# Altium PCB GPIOmodule.PcbDoc
Units mm, origin at the board's own origin, x right, y up, seen from the top; angles counter-clockwise.
Board outline 73.2 x 49.2 mm, 2 copper layers (Top Layer, Bottom Layer), stack 1.58 mm thick; 41 components, 27 nets, 131 pads, 14 vias.
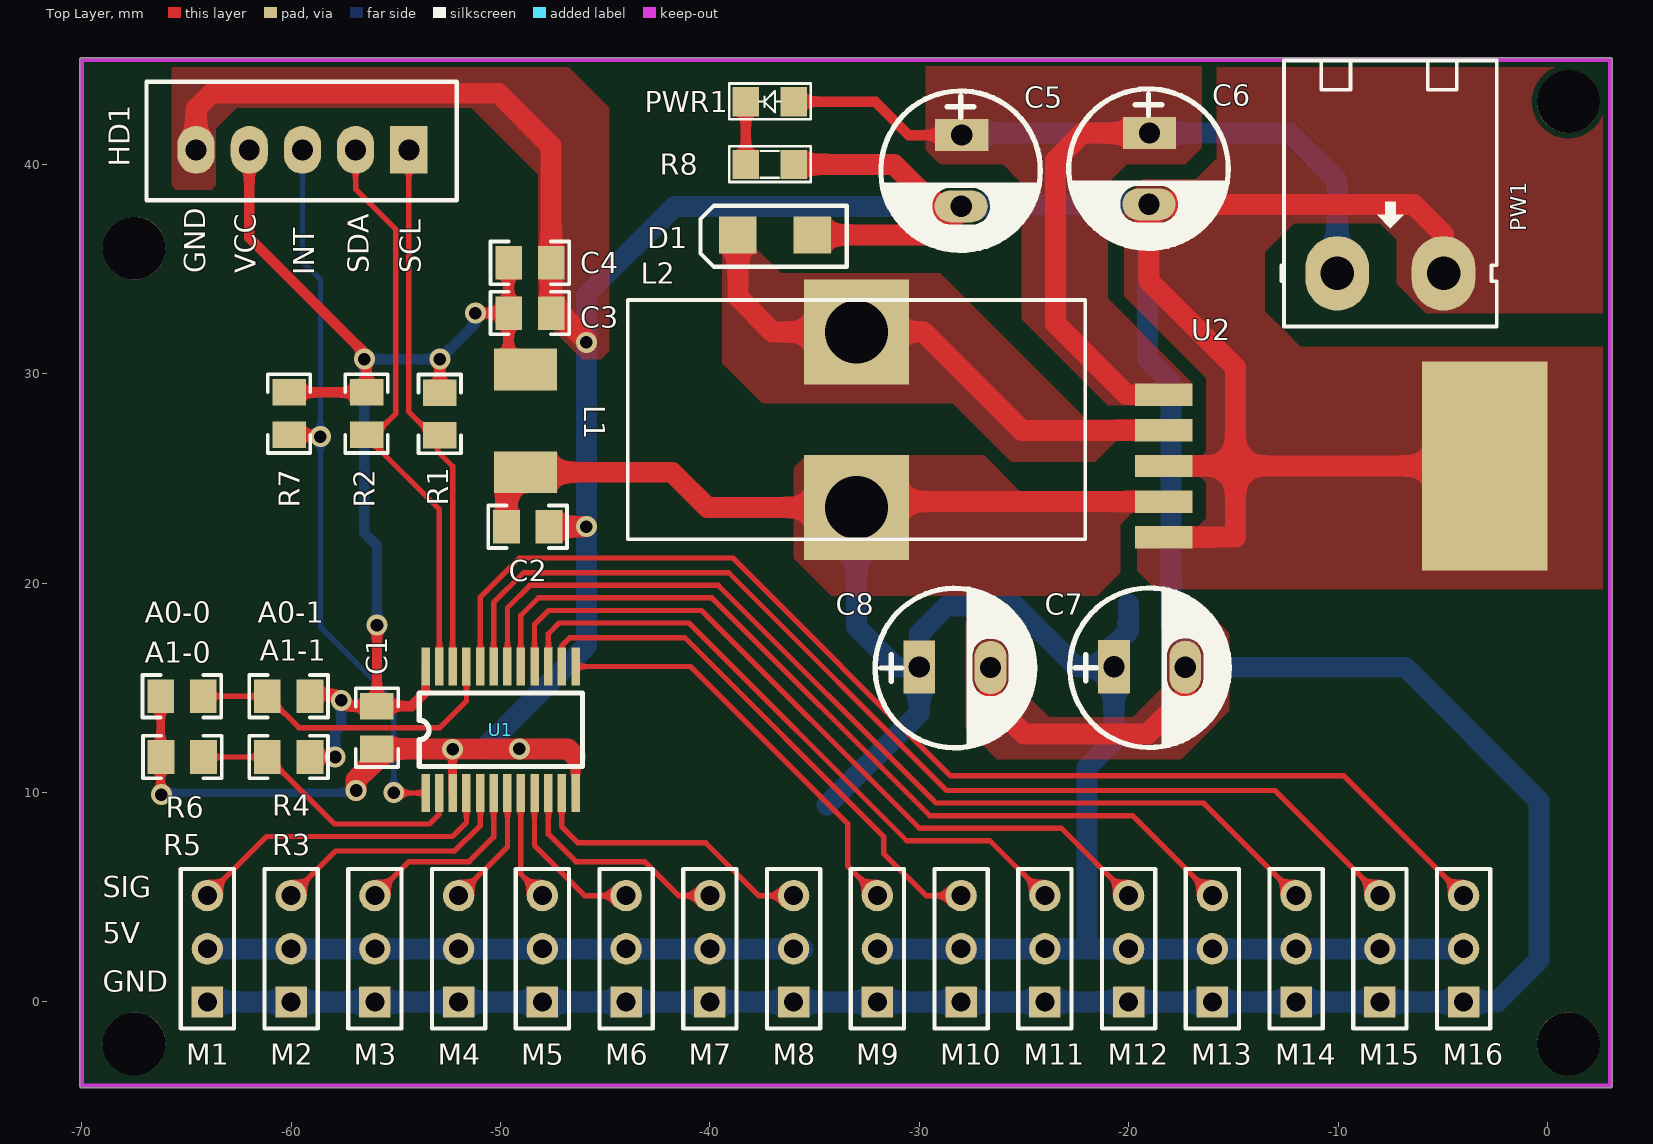
[diagram p0: Top Layer view]
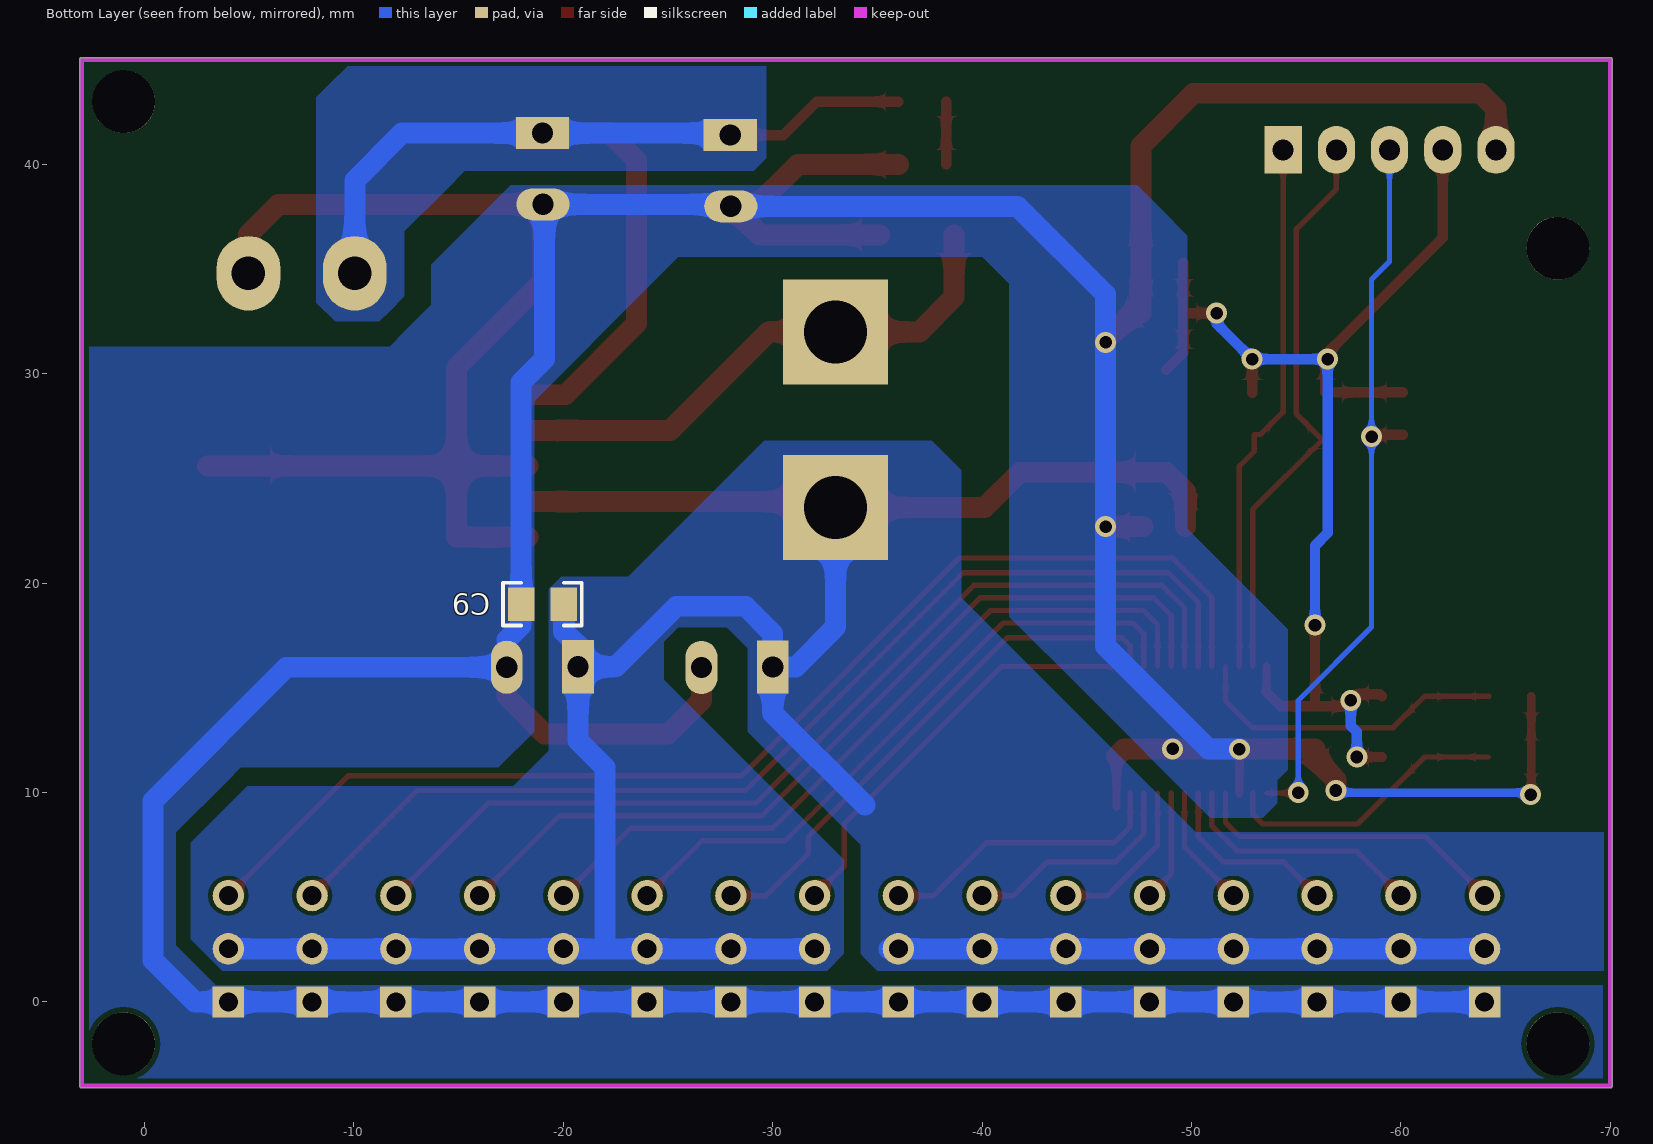
[diagram p1: Bottom Layer view, seen from below]

## Layer stack, top to bottom
Top Solder: solder mask 0.0102, Solder Resist, Dk 3.5
Top Layer: signal copper 0.0356
Dielectric 1: dielectric 1.5086, FR-4, Dk 4.8
Bottom Layer: signal copper 0.0356
Bottom Solder: solder mask 0.0102, Solder Resist, Dk 3.5

## Board outline
-70,-4.102 cw(c-70,-4) -70.1,-3.982 -70.1,44.982 cw(c-70,45) -70,45.102 3,45.102 cw(c3,45) 3.102,45 3.102,-4 cw(c3,-4) 3,-4.102

## Design rules (kind name [scope] priority, off if disabled: settings)
Clearance Clearance_1 [InNet('GND')] p1: gap=0.254
Clearance cutout [IsRegion] p2: gap=0.2
Clearance keepout [OnLayer('Keep-Out Layer')] p3: gap=0.2
Clearance [All] p4: gap=0.254
HoleSize [All] p1: absolutevalues=TRUE maxlimit=5 minlimit=0.01 maxpercent=80.000 minpercent=20.000
MinimumSolderMaskSliver [All] p1: minsoldermaskwidth=0.01
PolygonConnect [All] p1: connectstyle=Direct reliefconductorwidth=0.254 reliefentries=4 polygonreliefangle="90 Angle" airgapwidth=0.254
RoutingVias [All] p1: holewidth=0.3 width=0.6 viastyle="Through Hole" minholewidth=0.3 minwidth=0.6 maxholewidth=5 maxwidth=5
SilkToSilkClearance [All] p1: silktosilkclearance=0.1
SilkToSolderMaskClearance [IsPad] p1: minsilkscreentomaskgap=0.01 clearancetoexposedcopper=TRUE
SolderMaskExpansion [All] p1: expansion=0.102
Width [All] p1: maxlimit=5 minlimit=0.254 preferedwidth=0.254
26 further rules are at their usual default settings.

## Components (designator, comment, footprint, x,y, rotation, side; value= is the part's Value field where it differs from the comment)
C1 "104" 0805_HV -55.9,13.1 r90 top
C2 "104" 0805_HV -48.7,22.7 r180 top
C3 "106" 0805_HV -48.6,32.9 r180 top
C4 "104" 0805_HV -48.6,35.3 r180 top
C5 "390uF" CP1/3.0 -27.987,39.702 r270 top
C6 "390uF" CP1/3.0 -19.013,39.798 r270 top
C7 "390uF" CP1/3.0 -19,16 r0 top locked
C8 "390uF" CP1/3.0 -28.298,15.987 r0 top
C9 "104" 0805_HV -19,19 r180 bottom
D1 "IN5822" SOD123 -36,36 r0 top
HD1 "To MCU" "HEADER 5" -59.46,40.7 r180 top
L1 "680uF" "Inductor 4.5x5" -48.7,27.5 r270 top
L2 "100uF" IND_2118-V-RC -33,27.809 r270 top locked
M1 "Header 3" HDR1X3 -64,0 r90 top
M2 "Header 3" HDR1X3 -60,0 r90 top
M3 "Header 3" HDR1X3 -56,0 r90 top
M4 "Header 3" HDR1X3 -52,0 r90 top
M5 "Header 3" HDR1X3 -48,0 r90 top
M6 "Header 3" HDR1X3 -44,0 r90 top
M7 "Header 3" HDR1X3 -40,0 r90 top
M8 "Header 3" HDR1X3 -36,0 r90 top
M9 "Header 3" HDR1X3 -32,0 r90 top
M10 "Header 3" HDR1X3 -28,0 r90 top
M11 "Header 3" HDR1X3 -24,0 r90 top
M12 "Header 3" HDR1X3 -20,0 r90 top
M13 "Header 3" HDR1X3 -16,0 r90 top
M14 "Header 3" HDR1X3 -12,0 r90 top
M15 "Header 3" HDR1X3 -8,0 r90 top
M16 "Header 3" HDR1X3 -4,0 r90 top
PW1 "CON 2 EDG 5.08_MH" "CON 2 EDG 5.08" -7.5,34.8 r0 top locked (schematic designator CON1)
PWR1 "LED3" LED_0805 -37.143,43 r180 top
R1 "10K" 0805_HV -52.9,28.084 r90 top
R2 "10K" 0805_HV -56.4,28.1 r90 top
R3 "2.2K" 0805_HV -60.116,11.7 r0 top
R4 "2.2K" 0805_HV -60.116,14.6 r0 top
R5 "2.2K" 0805_HV -65.2,11.7 r0 top
R6 "2.2K" 0805_HV -65.216,14.6 r0 top
R7 "10K" 0805_HV -60.1,28.1 r90 top
R8 "2.2K" "Tro SMD 0805" -37.143,40 r180 top
U1 "TCA9555PWR" TSSOP-24 -50,13 r90 top
U2 "LM2576HVS" TO263-5 -18.289,25.6 r270 top

## Footprints (in the part's own frame and the unit in brackets; to place one, negate y for a bottom-side part, rotate by r counter-clockwise, add the part's x,y. Pads: shape width x height; smd on the part's side, far side on the other; paste and mask are expansions set on the pad)
0805_HV [mil] "0805 with 30mil clearance between pads"
  rect 50x63 smd: 1(-40,0) 2(40,0)
  silkscreen extent -74,-40 74,40, body extent -43,-29 43,29, height 57
"CON 2 EDG 5.08" [mil]
  oval 120x140 hole 62.99: 1(-100,0) 2(100,0)
  silkscreen extent -205,-100 200,400, body extent -197,-73 197,399, height 79
CP1/3.0 [mil]
  rect 60x100 hole 40: 1(-67,0.5)
  oval 60x100 hole 40: 2(67,-0.5)
  silkscreen extent -150,-151 150,148, body extent -156,-161 159,154, height 453
HDR1X3 [mm] "Connector; Header; 3 Position"
  rect 1.5x1.5 hole 0.9: 1(0,0)
  round 1.5 hole 0.9: 2(2.54,0) 3(5.08,0)
  silkscreen extent -1.27,-1.27 6.35,1.27
"HEADER 5" [mil]
  rect 70x90 hole 39.37 unplated: 1(-200,0)
  oval 70x90 hole 39.37 unplated: 2(-100,0) 3(0,0) 4(100,0) 5(200,0)
  silkscreen extent -290,-128 293,95
IND_2118-V-RC [mm] "INDUCTOR,2 LEAD,VERTICAL MOUNT,8.382mm PITCH,TH"
  rect 5x5 hole 3: 1(-4.191,0) 2(4.191,0)
  silkscreen extent -5.72,-10.92 5.72,10.92, body extent -5.72,-10.92 5.72,10.92, height 21.84
"Inductor 4.5x5" [mm]
  rect 2x3 smd: 1(2.2,-0.1) 2(-2.7,-0.1)
  body extent -2.6,-2.6 2.2,2.2, height 2
LED_0805 [mil]
  rect 50x55 smd: 1(-45,0) 2(45,0)
  silkscreen extent -77,-34 76,33, body extent -41,-16 41,20, height 33
SOD123 [mil]
  rect 70x70 smd: 1(35,25) 2(-105,25)
  silkscreen extent -175,-35 100,80, body extent -139,-29 66,73, height 95
TO263-5 [mm] "LM2576-SMD"
  rect 1.07x2.75 smd: 1(-3.4,-0.025) 2(-1.7,-0.025) 3(0,-0.025) 4(1.7,-0.025) 5(3.4,-0.025)
  rect 10x6 smd: 6(0,15.289)
  body extent -5,-0.38 5,15.29, height 4.79
"Tro SMD 0805" [mil]
  rect 50x55 smd: 1(-45,0) 2(45,0)
  silkscreen extent -77,-34 76,33, body extent -62,-28 56,27, height 21
TSSOP-24 [mil]
  rect 71x16 smd: 1(-119,141) 2(-119,115) 3(-119,90) 4(-119,64) 5(-119,38) 6(-119,13) 7(-119,-13) 8(-119,-38) 9(-119,-64) 10(-119,-90) 11(-119,-115) 12(-119,-141) 13(119,-141) 14(119,-115) 15(119,-90) 16(119,-64) 17(119,-38) 18(119,-13) 19(119,13) 20(119,38) 21(119,64) 22(119,90) 23(119,115) 24(119,141)
  silkscreen extent -69,-154 69,153, body extent -129,-156 129,156, height 42

## Part data
C1 C2 C3 C4 C9: library part CM, "Cap SMD"
C5 C6 C7 C8: library part "Capacitor TuHoa"
D1: library part "Diode S4 SOD123 ( 1N5819 SOD123)_MH", "Diode S4 SOD123 ( 1N5819 SOD123)"
HD1: library part "Header 5_MH", "Header 5P XH2.54 th?ng"
L1: library part "Inductor 4.5x5_MH"
L2: library part "Inductor Lm2576_MH", "cuon cam"
M1 M2 M3 M4 M5 M6 M7 M8 M9 M10 M11 M12 M13 M14 M15 M16: "Header, 3-Pin"
PW1: "CON 2 EDG 5.08 (xanh cong)"
PWR1: library part "LED SMD_0805_MH", "LED 3mm"
R1 R2 R3 R4 R5 R6 R7 R8: library part TRO_SMD_0805_MH, "TRO_SMD_0805_MH"
U2: library part "LM2576HVS-5.0V BUCK 5V 3A TO263-5 _MH", "LM2576HVS-5.0V BUCK 5V 3A TO263-5 _MH"

## Free pads (board coordinates)
  round 3 hole 3 paste+0: 0(1,43) 1(1,-2) 2(-67.5,-2) 3(-67.5,36)

## Via types
v1: diameter 1, hole 0.6, Top Layer to Bottom Layer, tented both sides, 14 vias

## Nets (pads, with @x,y where several pads share a name; then routed paths per layer and width w, separated by ;. In a path a pad name is that pad's centre, name@x,y a point inside that pad or via, vN(x,y) a via of type N, cw(c..) or ccw(c..) an arc to the next point about the centre after c; other vN are vias at no path point)
5V: C1.2 C3.2 C4.2 HD1.4 L1.2 R1.2 R2.2 R3.2 R4.2 R7.2 U1.24 | length 60.8
  Top Layer w0.4: -53.581,14.819 U1.24
  Top Layer w0.5: HD1.4 -62,36.5 -56.5,31 v1(-56.5,30.7) -56.4,30.6 R2.2 R7.2 ; R3.2 v1(-57.9,11.7) ; R4.2 -59,14.7 -57.9,14.7 -57.316,14.116 C1.2 v1(-55.9,18) ; C1.2@-55.8,14.132 -54.268,14.132 -53.581,14.819 ; R1.2 v1(-52.9,30.7) ; v1(-51.2,32.9) C3.2 ; C4.2 C3.2 ; L1.2 -49.616,31.016 C3.2
  Bottom Layer w0.5: v1(-57.9,11.7) -57.9,12.9 -57.608,13.192 v1(-57.608,14.408) ; v1(-55.9,18) -55.9,21.8 -56.5,22.4 v1(-56.5,30.7) v1(-52.9,30.7) -51.2,32.4 v1(-51.2,32.9)
12V: C5.1 C6.1 PW1.1 PWR1.1 U2.1 | length 51.5
  Top Layer w0.5: PWR1.1 -32.1,43 -30.504,41.404 C5.1
  Top Layer w1: C6.1 -22.2,41.5 -23.5,40.2 -23.5,32.4 -20.1,29 U2.1
  Bottom Layer w1: C5.1 -27.878,41.5 C6.1 -12.3,41.5 -10.04,39.24 PW1.1
A0: R4.1 R6.2 U1.21 | length 15.4
  Top Layer w0.254: R6.2 R4.1 -59.632,13.1 -56.858,13.1 -52.9,13.1 -51.626,14.374 U1.21
A1: R3.1 R5.2 U1.2 | length 13.8
  Top Layer w0.254: R5.2 R3.1 -57.932,8.5 -53.4,8.5 -52.921,8.979 U1.2
GND: C1.1 C2.1 C3.1 C4.1 C5.2 C6.2 C7.2 C8.2 C9.1 D1.1 HD1.5 M1.1 M2.1 M3.1 M4.1 M5.1 M6.1 M7.1 M8.1 M9.1 M10.1 M11.1 M12.1 M13.1 M14.1 M15.1 M16.1 PW1.2 R5.1 R6.1 R8.1 U1.3 U1.12 U2.3 U2.5 U2.6 | length 314.3
  Top Layer w0.4: R6.1 -66.232,9.932 v1(-66.2,9.9) ; U1.3 v1(-52.286,12.07) ; U1.12@-46.419,9.319 U1.12 -46.419,11.719
  Top Layer w1: HD1.5 -64.54,42.66 -63.8,43.4 -50.1,43.4 -47.584,40.884 C4.1 C3.1 -47.2,32.9 -45.9,31.6 v1(-45.9,31.5) ; v1(-56.9,10.1) -56.9,10.6 -55.9,11.6 C1.1 v1(-49.1,12.084) -46.784,12.084 -46.419,11.719 ; C2.1 v1(-45.9,22.7) ; R8.1 -31.2,40 -29.2,38 C5.2 -29.365,36.635 D1.1 ; C8.2 -26.596,14.396 -25,12.8 -19.1,12.8 -17.298,14.602 C7.2 ; U2.5 -14.9,22.2 -14.9,25.6 ; U2.3 -14.9,25.6 ; PW1.2 -4.96,36.66 -6.396,38.096 C6.2 -19.025,34.425 -14.9,30.3 -14.9,25.6 ; U2.6 -14.9,25.6
  Bottom Layer w0.4: v1(-66.2,9.9) -66.1,10 -57,10 v1(-56.9,10.1)
  Bottom Layer w1: M1.1 M2.1 M3.1 M4.1 M5.1 M6.1 M7.1 M8.1 M9.1 M10.1 M11.1 M12.1 M13.1 M14.1 M15.1 M16.1 -2.4,0 -0.4,2 -0.4,9.6 -6.787,15.987 C7.2 -17.298,17.298 -17.984,17.984 C9.1 -17.984,29.584 -19.1,30.7 -19.1,38.022 C6.2 -27.904,38.096 C5.2 -41.7,38 -45.9,33.8 v1(-45.9,31.5) v1(-45.9,22.7) -45.9,17 -50.816,12.084 v1@-52.286,12.084
I2C_SCL: HD1.1 R1.1 U1.22 | length 25.7
  Top Layer w0.254: HD1.1 -54.38,28.18 -53.3,27.1 -53,27.1 -53,26.3 -52.286,25.586 U1.22
I2C_SDA: HD1.2 R2.1 U1.23 | length 27.8
  Top Layer w0.254: HD1.2 -56.92,38.82 -55,36.9 -55,28.1 R2.1@-56.3,26.8 ; R2.1 -56.4,26.9 R2.1@-56.3,26.8 ; U1.23 -52.921,23.521 -56.2,26.8 R2.1@-56.3,26.8
INT: HD1.3 R7.1 U1.1 | length 35.6
  Top Layer w0.254: v1@-55.077,9.977 U1.1
  Top Layer w0.5: R7.1 -58.684,27.084 v1(-58.6,27) ; v1(-55.1,10) v1@-55.077,9.977
  Bottom Layer w0.254: HD1.3 -59.46,35.36 -58.6,34.5 v1(-58.6,27) -58.6,17.9 -55.1,14.4 v1(-55.1,10)
MO_5V: C2.2 C7.1 C8.1 C9.2 L1.1 L2.2 M1.2 M2.2 M3.2 M4.2 M5.2 M6.2 M7.2 M8.2 M9.2 M10.2 M11.2 M12.2 M13.2 M14.2 M15.2 M16.2 U2.4 | length 138.6
  Top Layer w1: C2.2 -49.716,24.384 L1.1 -41.8,25.3 -40.118,23.618 L2.2 -32.718,23.9 U2.4
  Bottom Layer w1: M1.2 M2.2 M3.2 M4.2 M5.2 M6.2 M7.2 M8.2 M8.2@-35.56,2.54 ; -34.4,9.4 -30,13.8 C8.1 ; L2.2 -33,17.9 -31.1,16 C8.1 ; M9.2 M10.2 M11.2 -21.94,2.54 ; C9.2 -20.016,17.684 -20.702,16.998 C7.1 ; M16.2 M15.2 M14.2 M13.2 M12.2 -21.94,2.54 ; C8.1 -30,17.6 -28.7,18.9 -25.4,18.9 -22.513,16.013 C7.1 ; -21.94,2.54 -22,2.6 -22,11.2 -20.702,12.498 C7.1
NetD1_2: D1.2 L2.1 U2.2 | length 26
  Top Layer w1: D1.2 -38.667,33.667 -37,32 L2.1 -29.8,32 -25.1,27.3 U2.2
NetPWR1_2: PWR1.2 R8.2 | length 3
  Top Layer w0.5: R8.2 PWR1.2
P00: M1.3 U1.4 | length 15.2
  Top Layer w0.254: M1.3 -61.18,7.9 -52.3,7.9 -51.626,8.574 U1.4
P01: M2.3 U1.5 | length 12
  Top Layer w0.254: M2.3 -57.872,7.208 -52.192,7.208 -50.965,8.435 U1.5
P02: M3.3 U1.6 | length 8.9
  Top Layer w0.254: M3.3 -54.38,6.7 -51.5,6.7 -50.33,7.87 U1.6
P03: M4.3 U1.7 | length 5.9
  Top Layer w0.254: M4.3 -49.67,7.41 U1.7
P04: M5.3 U1.8 | length 5.3
  Top Layer w0.254: U1.8 -49.035,6.115 M5.3
P05: M6.3 U1.9 | length 7.9
  Top Layer w0.254: U1.9 -48.374,7.474 -45.98,5.08 M6.3
P06: M7.3 U1.10 | length 10.9
  Top Layer w0.254: U1.10 -47.714,8.014 -46.4,6.7 -43.12,6.7 -41.5,5.08 M7.3
P07: M8.3 U1.11 | length 14
  Top Layer w0.254: U1.11 -47.079,8.379 -46.3,7.6 -40.2,7.6 -37.68,5.08 M8.3
P10: M9.3 U1.13 | length 20.1
  Top Layer w0.254: U1.13 -40.923,16.023 -33.42,8.52 -33.42,6.5 M9.3
P11: M10.3 U1.14 | length 25.8
  Top Layer w0.254: U1.14 -47.079,17.006 -46.685,17.4 -41.2,17.4 -31.7,7.9 -31.7,7.1 -29.68,5.08 M10.3
P12: M11.3 U1.15 | length 30.9
  Top Layer w0.254: U1.15 -47.714,17.586 -47.2,18.1 -41,18.1 -30.6,7.7 -26.62,7.7 M11.3
P13: M12.3 U1.16 | length 36.3
  Top Layer w0.254: U1.16 -48.374,18.026 -47.7,18.7 -40.4,18.7 -30,8.3 -23.22,8.3 M12.3
P14: M13.3 U1.17 | length 41.7
  Top Layer w0.254: U1.17 -49.035,18.465 -48.2,19.3 -39.9,19.3 -29.5,8.9 -19.82,8.9 M13.3
P15: M14.3 U1.18 | length 47.1
  Top Layer w0.254: U1.18 -49.67,18.83 -48.6,19.9 -39.6,19.9 -29.2,9.5 -16.42,9.5 M14.3
P16: M15.3 U1.19 | length 52.4
  Top Layer w0.254: U1.19 -50.33,19.07 -48.9,20.5 -39.1,20.5 -28.7,10.1 -13.02,10.1 M15.3
P17: M16.3 U1.20 | length 57.7
  Top Layer w0.254: U1.20 -50.965,19.335 -49.1,21.2 -38.9,21.2 -28.5,10.8 -9.72,10.8 M16.3

## Polygon pours and split planes (outlines as drawn)
GND on Bottom Layer "Bottom Layer-No Net" (solid, pour order 11): -70,0.6 -69.8,0.8 -64.2,0.8 -21.9,0.8 -3.4,0.8 -1.5,2.7 -1.5,5.5 -1.5,8.1 -3.9,10.5 -4.6,11.2 -15.1,11.2 -16.9,11.2 -18.6,12.9 -18.6,18.5 -18.6,28.7 -24,34.1 -25.5,35.6 -40,35.6 -41.3,34.3 -41.3,28.5 -41.3,18.4 -44.8,14.9 -50.9,8.8 -53.4,8.8 -54.1,9.5 -54.1,10.6 -54.6,11.1 -54.6,12.3 -54.6,17.8 -50.6,21.8 -49.8,22.6 -49.8,34.2 -49.8,36.6 -48.5,37.9 -47.4,39 -28.1,39 -17.5,39 -15.9,37.4 -13.7,35.2 -13.7,33.9 -13.7,33.3 -12.4,32 -11.7,31.3 -6.5,31.3 3,31.3 3,-4 -70,-4
MO_5V on Bottom Layer "Bottom Layer-No Net" (solid, pour order 10): -70,8.1 -50.2,8.1 -48.2,10.1 -39,19.3 -39,23.8 -39,25.4 -37.9,26.5 -37.6,26.8 -35,26.8 -29.6,26.8 -25.8,23 -23.1,20.3 -21.8,20.3 -19.9,20.3 -19.5,19.9 -19.3,19.7 -19.3,17.9 -19.3,17.6 -19.3,12 -18.7,11.4 -17.6,10.3 -11.4,10.3 -4.9,10.3 -2.3,7.7 -2.2,7.6 -2.2,4.4 -2.2,3 -3.7,1.5 -5.3,1.5 -32.6,1.5 -33.4,2.3 -33.4,6.8 -24.8,15.4 -24.8,16.1 -24.8,17.2 -25.2,17.6 -25.5,17.9 -26.2,17.9 -27.8,17.9 -28.2,17.5 -28.8,16.9 -28.8,15.2 -28.8,12.9 -30.9,10.8 -34.2,7.5 -34.2,2.3 -34.4,2.1 -35,1.5 -70,1.5
12V on Bottom Layer "Bottom Layer-No Net" (solid, pour order 15): -29.7,41 -29.7,45 -10,45 -8.8,43.8 -8.2,43.2 -8.2,35.4 -8.2,33.4 -9.1,32.5 -11.2,32.5 -11.7,33 -12.4,33.7 -12.4,36.6 -12.4,36.8 -14.4,38.8 -15.3,39.7 -17.9,39.7 -29.1,39.7 -29.7,40.3
GND on Top Layer "Bottom Layer-No Net" (solid, pour order 18): -27.8,18.1 -27.8,13.1 -27.1,12.4 -26.3,11.6 -17.5,11.6 -16.4,12.7 -15.2,13.9 -15.2,16.4 -15.2,17.6 -15.9,18.3 -17.5,18.3 -17.9,18.3 -18.3,17.9 -18.4,17.8 -18.4,15.6 -18.4,15 -18.9,14.5 -19.8,13.6 -21.8,13.6 -23.8,13.6 -24.5,14.3 -25.2,15 -25.2,17.2 -25.2,18.1 -25.6,18.5 -27.4,18.5
GND on Top Layer "Bottom Layer-No Net" (solid, pour order 17): -65.7,39 -65.7,45 -47.1,45 -46.4,44.3 -44.8,42.7 -44.8,31.8 -44.8,31.1 -45.1,30.8 -45.2,30.7 -45.6,30.7 -46.1,30.7 -48.2,32.8 -48.2,34.3 -48.2,39.5 -50.9,42.2 -51.4,42.7 -53.8,42.7 -62.6,42.7 -63.1,42.2 -63.6,41.7 -63.6,40.8 -63.6,39 -63.8,38.8 -65.5,38.8
NetD1_2 on Top Layer "Bottom Layer-No Net" (solid, pour order 16): -18,27.8 -20.1,27.8 -22,27.8 -23.2,29 -29,34.8 -36.6,34.8 -37.9,36.1 -37.9,37.3 -38,37.4 -39.4,37.4 -39.4,33 -39.4,30.5 -38.1,29.2 -37.5,28.6 -31.4,28.6 -28.4,28.6 -26.1,26.3 -25.6,25.8 -23.2,25.8 -21.6,25.8 -21,26.4 -20.5,26.9 -18.7,26.9
MO_5V on Top Layer "Bottom Layer-No Net" (solid, pour order 14): -17.4,24.4 -25.2,24.4 -26.9,26.1 -30.9,26.1 -35.4,26.1 -35.8,25.7 -36,25.5 -36,22.3 -36,21.2 -35.5,20.7 -34.2,19.4 -31.4,19.4 -21.5,19.4 -20.4,20.5 -20.4,22.8 -19.8,23.4 -19.5,23.4 -17.5,23.4 -17.3,23.6
GND on Top Layer "Bottom Layer-No Net" (solid, pour order 13): 2.9,32.9 -5.8,32.9 -7.1,34.2 -7.2,34.3 -7.2,36.3 -7.2,36.4 -8,37.2 -11.7,37.2 -12.1,37.2 -12.9,36.4 -13.5,35.8 -13.5,34.4 -13.5,33 -12.5,32 -11.8,31.3 -4.2,31.3 2.9,31.3 3,31.2 3,19.7 -18.7,19.7 -19.6,20.6 -19.6,22.6 -19.5,22.7 -17.4,22.7 -17,22.7 -16.7,22.7 -16.4,23 -16.3,23.1 -16.3,24.7 -16.3,24.8 -16.8,25.3 -16.7,25.4 -16.7,25.9 -16.4,26.2 -16.3,26.3 -16.3,28.3 -16.3,29.8 -17.1,30.6 -20.2,33.7 -20.2,38.2 -20.2,38.4 -19.6,39 -19.3,39.3 -17.3,39.3 -16.8,39.3 -16.2,39.9 -15.8,40.3 -15.8,45 -15.69,45.11 3,45.11
12V on Top Layer "Bottom Layer-No Net" (solid, pour order 12): -29.7,45 -29.7,41 -29.7,40.7 -29.3,40.3 -29,40 -27.3,40 -26,40 -25.3,39.3 -25.1,39.1 -25.1,33.7 -25.1,32.6 -21,28.5 -17.5,28.5 -17,28.5 -17,29.6 -17.7,30.3 -21,33.6 -21,38.7 -21,39.1 -20.4,39.7 -20.1,40 -18,40 -17.3,40 -16.7,40.6 -16.5,40.8 -16.5,45

## Keep-outs
Keep-Out Layer:
  lines w0.2: -70,-4 -70,45
  lines w0.203: -70,-4 3,-4 3,45 -70,45

## Silkscreen, mask and mechanical layers (free items; w line width, h text height)
Top Overlay:
  text "GND" at -64.1,34.8 h1 r90
  text "VCC" at -61.7,34.8 h1 r90
  text "SDA" at -56.3,34.8 h1 r90
  text "SCL" at -53.8,34.8 h1 r90
  text "INT" at -58.9,34.7 h1 r90
  text "A0-0" at -67,18.1 h1
  text "A0-1" at -61.6,18.1 h1
  text "A1-1" at -61.5,16.3 h1
  text "A1-0" at -67,16.2 h1
  text "SIG" at -69,5 h1
  text "5V" at -69,2.8 h1
  text "GND" at -69,0.5 h1

## Text inside footprints (layer, text, board x,y; h text height)
L2: Mechanical 17 "LEAD LENGTH:12.7MM" at -27.666,39.747 h1 r270